# Altium PCB PCB_RB2_My _ver3.PcbDoc
Units mm, origin at the board's own origin, x right, y up, seen from the top; angles counter-clockwise.
Board outline 198 x 170 mm, 2 copper layers (Top, Bottom); 88 components, 70 nets, 391 pads, 183 vias.
Unrouted connection lines stored in the file: 79.
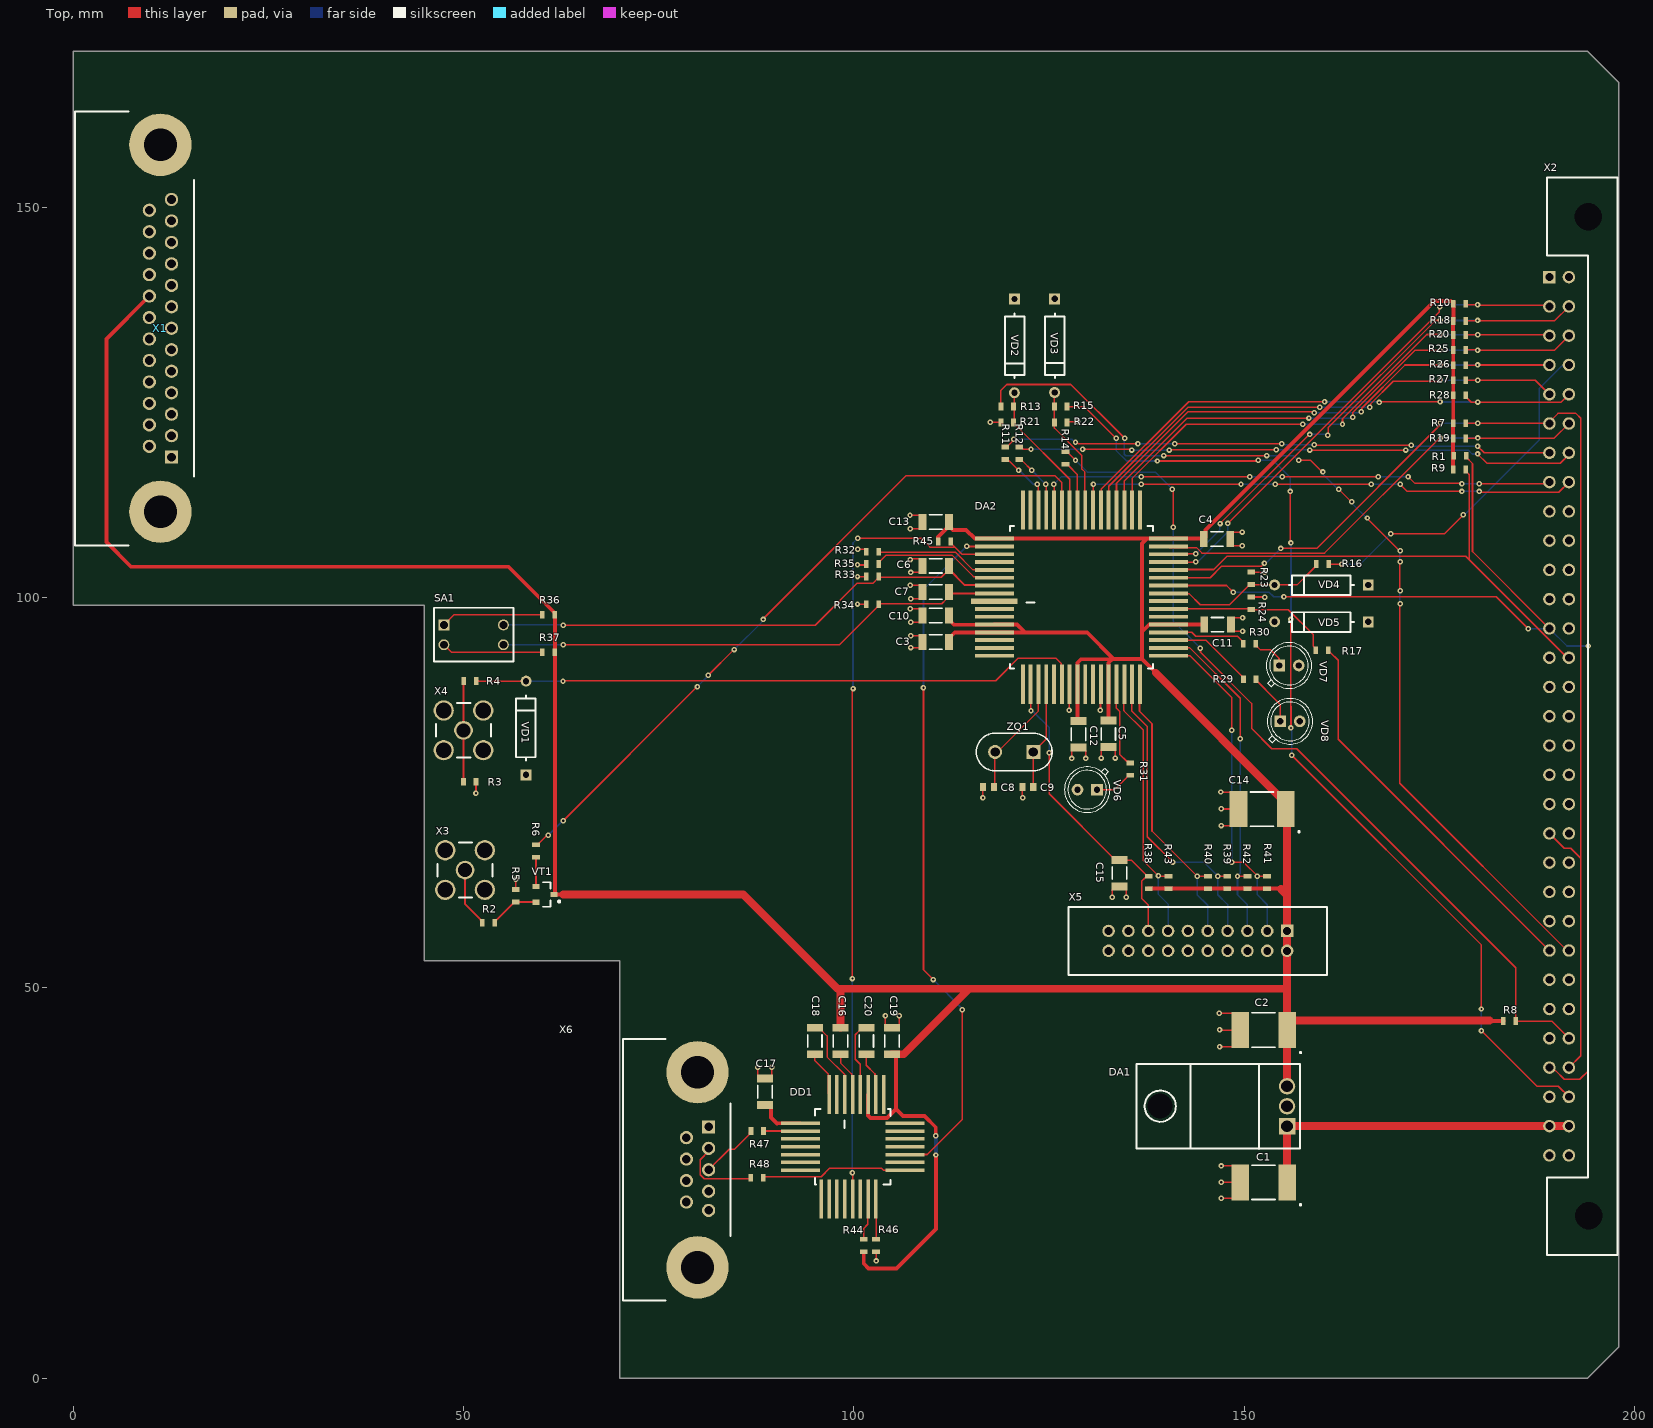
[diagram p0: Top view]
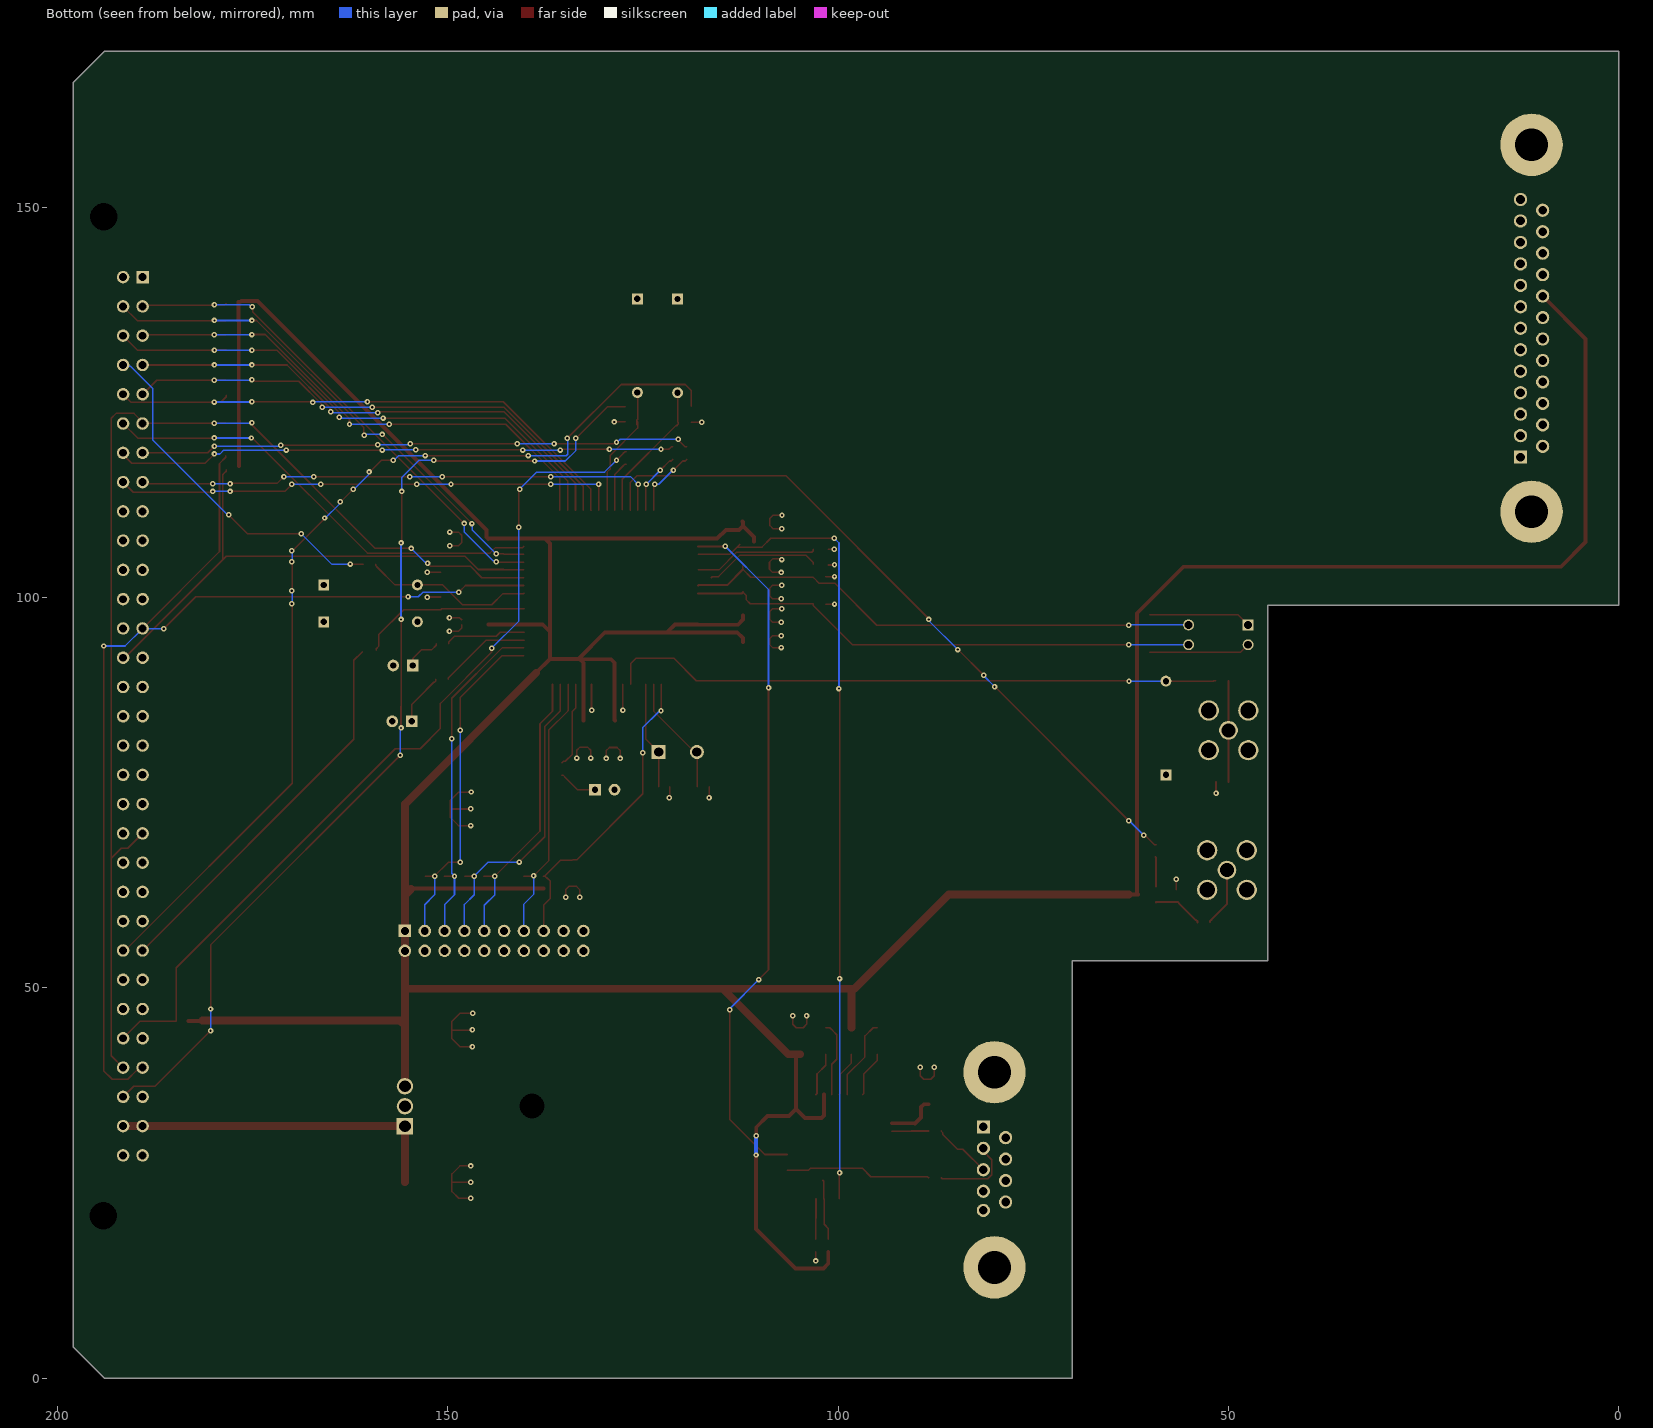
[diagram p1: Bottom view, seen from below]
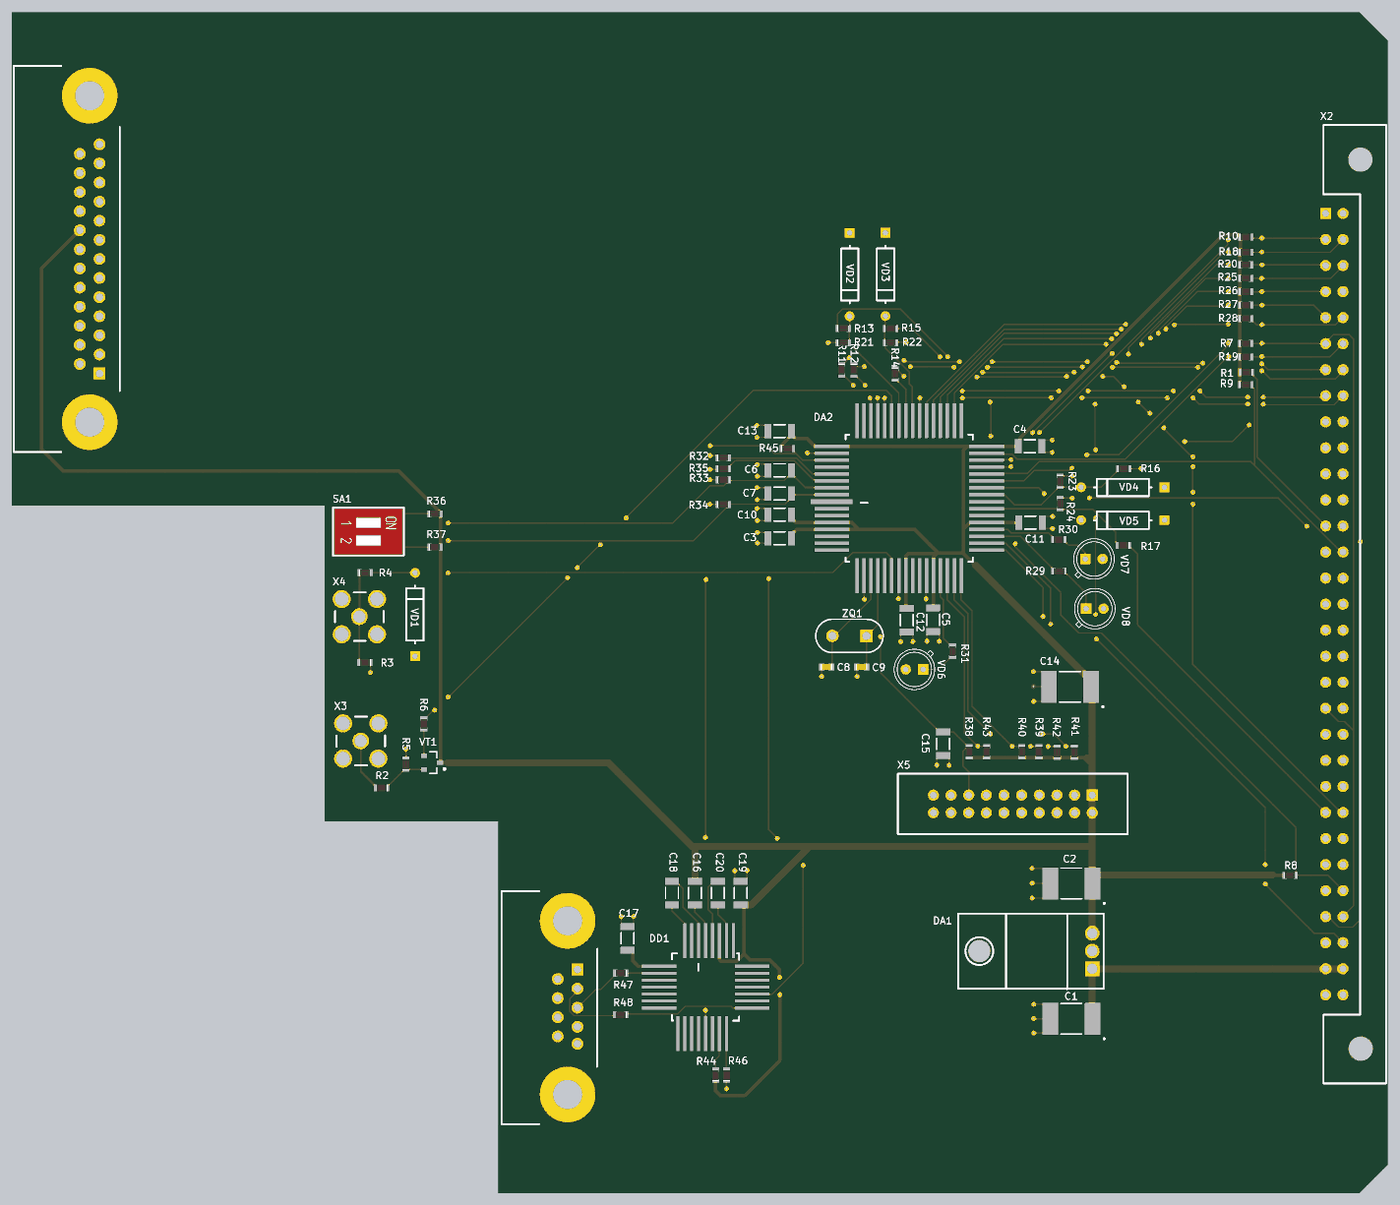
[diagram p2: 3D render of the assembled board from above, using the file's embedded part models]

## Layer stack, top to bottom
Top Solder: solder mask 0.0102, Solder Resist, Dk 3.5
Top: signal copper 0.0356
Dielectric 1: dielectric 0.32, FR-4, Dk 4.8
Bottom: signal copper 0.0356
Bottom Solder: solder mask 0.0102, Solder Resist, Dk 3.5

## Board outline
70,0 70,53.5 45,53.5 45,99 0,99 0,170 194,170 198,166 198,4 194,0

## Design rules (kind name [scope] priority, off if disabled: settings)
AcuteAngle [All] p1: minimum=3.50000000000000E+0001 checktracksonly=FALSE
BoardOutlineClearance "BoardOutlineClearance Fres ExtLayer" [OnTopLayer or OnBottomLayer] p1: gap=0.25 ignorepadtopadclearanceinfootprint=FALSE except(0: Arc-SplitContinuation Track-SplitContinuation SMDPad-SplitContinuation THPad-SplitContinuation Via-SplitContinuation Fill-SplitContinuation Poly-SplitContinuation Region-SplitContinuation Text-SplitContinuation) // Milling
BoardOutlineClearance "BoardOutlineClearance Fres IntLayer" [(OnMid        or OnMultiLayer) and not IsKeepOut] p2: gap=0.5 ignorepadtopadclearanceinfootprint=FALSE except(0: Arc-SplitContinuation Track-SplitContinuation SMDPad-SplitContinuation THPad-SplitContinuation Via-SplitContinuation Fill-SplitContinuation Poly-SplitContinuation Region-SplitContinuation Text-SplitContinuation) // Milling
Clearance "Clearance KeepOut" [All vs OnLayer('Keep-Out Layer')] p1: gap=0.5 ignorepadtopadclearanceinfootprint=TRUE // Standart
Clearance "Clearance Cap" [HasFootprint('CAPC3419X15N(1206)')] p2: gap=0 ignorepadtopadclearanceinfootprint=TRUE except(0.8: SMDPad-SMDPad)
Clearance "Clearance Sdt" [All] p3: gap=0.125 ignorepadtopadclearanceinfootprint=TRUE except(0.2: Arc-Fill Arc-Poly Track-Fill Track-Poly SMDPad-SMDPad SMDPad-Fill SMDPad-Poly THPad-Fill THPad-Poly Via-Fill Via-Poly Fill-Fill Fill-Poly Poly-Poly Poly-Region Poly-Text; 0.25: Arc-Hole Track-Hole SMDPad-Hole THPad-Hole Via-Hole Fill-Hole Poly-Hole Region-Hole Text-Hole) // Standart
ComponentClearance ComponentClearance_Connector [(HasFootprint('СНП347-20ВП22-В') OR HasFootprint('СНП268-25РП32-1-4-В') OR HasFootprint('СНП268-9ВП32-1-4-В') OR HasFootprint('ГРПМ9-62ШУ2-В') OR HasFootprint('DS1040-02RN') OR HasFootprint('HYR-1149'))] p1: gap=1.6 collisioncheckmode=3 verticalgap=0.2 showdistances=FALSE
ComponentClearance ComponentClearance_Res [HasFootprint('RESC1608X05N (0603)')] p2: gap=0.2 collisioncheckmode=3 verticalgap=0.2 showdistances=FALSE
ComponentClearance ComponentClearance_VD [HasFootprint('2С127Д-1') or HasFootprint('3Л341Б')] p3: gap=1.2 collisioncheckmode=3 verticalgap=0.2 showdistances=FALSE
ComponentClearance [All] p4: gap=0.8 collisioncheckmode=3 verticalgap=0.2 showdistances=FALSE
DiffPairsRouting "DiffPairsRouting 1 Oz" [All] p1: maxlimit=0.5 minlimit=0.125 mostfreqgap=0.3 toplayer_minwidth=0.125 toplayer_maxwidth=0.5 toplayer_prefwidth=0.2 bottomlayer_minwidth=0.125 bottomlayer_maxwidth=0.5 bottomlayer_prefwidth=0.2 maxuncoupledlength=12.7
HoleSize "Minimum HoleSize" [IsPad] p1: absolutevalues=TRUE maxlimit=5.9 minlimit=0.6 maxpercent=80.000 minpercent=20.000
HoleSize "Minimum HoleSize VIA 1" [IsVia] p2: absolutevalues=TRUE maxlimit=5.9 minlimit=0.3 maxpercent=80.000 minpercent=20.000 // Standart
HoleSize "Minimum HoleSize VIA 2" [IsVia] p3: absolutevalues=TRUE maxlimit=5.9 minlimit=0.2 maxpercent=80.000 minpercent=20.000 // Advance
HoleToHoleClearance Hole2HoleClearance [All] p1: gap=0.25 allowstackedmicrovias=FALSE
MinimumAnnularRing "Minimum AR VIA Standart" [All] p1: minimumring=0.15
MinimumAnnularRing "Minimum AR PAD Standart" [All] p2: minimumring=0.2
MinimumSolderMaskSliver "SolderMask Bridge Standart" [All] p1: minsoldermaskwidth=0.15 // All Masks
PlaneClearance "PlaneClearance Std" [All] p1: clearance=0.2 // Standart
PlaneConnect "TermalConnect Std" [All] p1: pad.planeconnectstyle=Relief pad.reliefexpansion=0.2 pad.reliefentries=4 pad.reliefconductorwidth=0.3 pad.reliefairgap=0.2 via.planeconnectstyle=Direct via.reliefexpansion=0.2 via.reliefentries=4 via.reliefconductorwidth=0.2 via.reliefairgap=0.2 // Standart
PolygonConnect PolygonConnect_Via [isVia] p1: connectstyle=Direct reliefconductorwidth=0.254 reliefentries=4 polygonreliefangle="90 Angle" airgapwidth=0.254
PolygonConnect "PolygonConnect Std" [All] p2: connectstyle=Relief reliefconductorwidth=0.2 reliefentries=4 polygonreliefangle="90 Angle" airgapwidth=0.2 // Standart
RoutingCorners [All] p1 off: cornerstyle=45-Degree minsetback=2.54 maxsetback=2.54
RoutingVias [All] p1: holewidth=0.3 width=0.7 viastyle="Through Hole" minholewidth=0.3 minwidth=0.7 maxholewidth=0.6 maxwidth=1.1 viatemplateguid#1={5BCA8359-3FDF-4503-88DF-982B2CC54C6B} viatemplatename#1=v60h30m0mx0(Tol0-10)
SMDEntry [All] p1: side=TRUE corner=TRUE anyangle=FALSE
SMDNeckDown [All] p1: percent=100.000
SMDToCorner [All] p1: distance=0
SMDToPlane [All] p1: distance=0
SilkToSilkClearance Silk2SilkClearance [All] p1: silktosilkclearance=0.15
SilkToSolderMaskClearance Silk2SolderMaskClearance [IsPad] p1: minsilkscreentomaskgap=0.15 clearancetoexposedcopper=FALSE
SolderMaskExpansion "SolderMaskExpansion Std" [All] p1: expansion=0.05 istentingtop=FALSE // Standart
UnRoutedNet [All] p1: checkbadconnections=TRUE
Width "Width Std" [All] p1: maxlimit=10 minlimit=0.125 preferedwidth=0.2 checkconnectedcopper=TRUE // Standart
19 further rules are at their usual default settings.

## Components (designator, comment, footprint, x,y, rotation, side; value= is the part's Value field where it differs from the comment)
C1 "К53-65-16В-100мкФАЖЯР.673546.004ТУ" Chip2PinSM127P600-8N(E) 152.5,25.1 r180 top value=100мк
C2 "К53-65-16В-100мкФАЖЯР.673546.004ТУ" Chip2PinSM127P600-8N(E) 152.5,44.6 r180 top value=100мк
C3 "К10-17в-Н90-0,1мкФ-3ОЖО.460.107ТУ" CAPC3419X15N(1206) 110.5,94.3 r180 top value=0,1мк
C4 "К10-17в-Н90-0,1мкФ-3ОЖО.460.107ТУ" CAPC3419X15N(1206) 146.525,107.525 r0 top value=0,1мк
C5 "К10-17в-Н90-0,1мкФ-3ОЖО.460.107ТУ" CAPC3419X15N(1206) 132.6,82.55 r270 top value=0,1мк
C6 "К10-17в-Н90-0,1мкФ-3ОЖО.460.107ТУ" CAPC3419X15N(1206) 110.5,104.075 r0 top value=0,1мк
C7 "К10-17в-Н90-0,1мкФ-3ОЖО.460.107ТУ" CAPC3419X15N(1206) 110.5,100.7 r0 top value=0,1мк
C8 "К10-17в-МПО-22Ф10%-1ОЖО.460.107ТУ" "CAPC1608X09N (0603)" 117.243,75.75 r180 top value=22
C9 "К10-17в-МПО-22Ф10%-1ОЖО.460.107ТУ" "CAPC1608X09N (0603)" 122.3,75.75 r180 top value=22
C10 "К10-17в-Н90-0,1мкФ-3ОЖО.460.107ТУ" CAPC3419X15N(1206) 110.5,97.7 r180 top value=0,1мк
C11 "К10-17в-Н90-0,1мкФ-3ОЖО.460.107ТУ" CAPC3419X15N(1206) 146.6,96.525 r0 top value=0,1мк
C12 "К10-17в-Н90-0,1мкФ-3ОЖО.460.107ТУ" CAPC3419X15N(1206) 128.8,82.5 r270 top value=0,1мк
C13 "К10-17в-Н90-0,1мкФ-3ОЖО.460.107ТУ" CAPC3419X15N(1206) 110.5,109.7 r180 top value=0,1мк
C14 "К53-65-16В-100мкФАЖЯР.673546.004ТУ" Chip2PinSM127P600-8N(E) 152.3,72.9 r180 top value=100мк
C15 "К10-17в-Н90-0,1мкФ-3ОЖО.460.107ТУ" CAPC3419X15N(1206) 134.025,64.7 r270 top value=0,1мк
C16 "К10-17в-Н30-0,22мкФ-3ОЖО.460.107ТУ" CAPC3419X15N(1206) 98.3,43.2 r90 top value=0,22мк
C17 "К10-17в-Н30-0,22мкФ-3ОЖО.460.107ТУ" CAPC3419X15N(1206) 88.6,36.7 r270 top value=0,22мк
C18 "К10-17в-Н30-0,22мкФ-3ОЖО.460.107ТУ" CAPC3419X15N(1206) 95,43.2 r270 top value=0,22мк
C19 "К10-17в-Н30-0,22мкФ-3ОЖО.460.107ТУ" CAPC3419X15N(1206) 104.9,43.2 r270 top value=0,22мк
C20 "К10-17в-Н30-0,22мкФ-3ОЖО.460.107ТУ" CAPC3419X15N(1206) 101.6,43.2 r270 top value=0,22мк
DA1 "1303ЕН3.3П" КТ-28А-2.01 163,32.3 r90 top
DA2 "1986ВЕ92У" 1986ВЕ92У 121.65,88.9 r0 top
DD1 "5559ИН4У" 5559ИН4У 98.8,36.3 r270 top
R1 "Р1-12-0,125-10кОм5%" "RESC1608X05N (0603)" 177.65,118.175 r180 top value=10к
R2 "Р1-12-0,1-05%" "RESC1608X05N (0603)" 53.2,58.35 r0 top value=0
R3 "Р1-12-0,1-505%" "RESC1608X05N (0603)" 50.8,76.4 r180 top value=50
R4 "Р1-12-0,125-1к5%" "RESC1608X05N (0603)" 50.825,89.325 r0 top value=1к
R5 "Р1-12-0,125-560Ом5%" "RESC1608X05N (0603)" 56.7,61.8 r270 top value=560
R6 "Р1-12-0,125-560Ом5%" "RESC1608X05N (0603)" 59.275,67.55 r270 top value=560
R7 "Р1-12-0,125-10кОм5%" "RESC1608X05N (0603)" 177.575,122.325 r180 top value=10к
R8 "Р1-12-0,1-0,155%" "RESC1608X05N (0603)" 184,45.75 r180 top value=0,15
R9 "Р1-12-0,125-10кОм5%" "RESC1608X05N (0603)" 177.6,116.4 r180 top value=10к
R10 "Р1-12-0,125-10кОм5%" "RESC1608X05N (0603)" 177.6,137.65 r180 top value=10к
R11 "Р1-12-0,1-0,155%" "RESC1608X05N (0603)" 119.4,118.5 r270 top value=0,15
R12 "Р1-12-0,1-0,155%" "RESC1608X05N (0603)" 121.2,118.5 r270 top value=0,15
R13 "Р1-12-0,1-1,8кОм5%" "RESC1608X05N (0603)" 119.65,124.5 r0 top value=1,8к
R14 "Р1-12-0,1-0,155%" "RESC1608X05N (0603)" 127.125,117.9 r270 top value=0,15
R15 "Р1-12-0,1-1кОм5%" "RESC1608X05N (0603)" 126.5,124.475 r180 top value=1к
R16 "Р1-12-0,1-1,8кОм5%" "RESC1608X05N (0603)" 160.05,104.3 r180 top value=1,8к
R17 "Р1-12-0,1-1,8кОм5%" "RESC1608X05N (0603)" 159.973,93.249 r180 top value=1,8к
R18 "Р1-12-0,125-10кОм5%" "RESC1608X05N (0603)" 177.6,135.45 r180 top value=10к
R19 "Р1-12-0,125-10кОм5%" "RESC1608X05N (0603)" 177.575,120.4 r180 top value=10к
R20 "Р1-12-0,125-10кОм5%" "RESC1608X05N (0603)" 177.583,133.65 r180 top value=10к
R21 "Р1-12-0,125-2705%" "RESC1608X05N (0603)" 119.65,122.45 r180 top value=270
R22 "Р1-12-0,125-2705%" "RESC1608X05N (0603)" 126.5,122.45 r0 top value=270
R23 "Р1-12-0,125-2705%" "RESC1608X05N (0603)" 150.9,102.475 r90 top value=270
R24 "Р1-12-0,125-2705%" "RESC1608X05N (0603)" 150.9,99.275 r90 top value=270
R25 "Р1-12-0,125-10кОм5%" "RESC1608X05N (0603)" 177.583,131.725 r180 top value=10к
R26 "Р1-12-0,125-10кОм5%" "RESC1608X05N (0603)" 177.583,129.775 r180 top value=10к
R27 "Р1-12-0,125-10кОм5%" "RESC1608X05N (0603)" 177.583,127.85 r180 top value=10к
R28 "Р1-12-0,125-10кОм5%" "RESC1608X05N (0603)" 177.583,125.925 r180 top value=10к
R29 "Р1-12-0,125-1к5%" "RESC1608X05N (0603)" 150.725,89.55 r0 top value=1к
R30 "Р1-12-0,125-1к5%" "RESC1608X05N (0603)" 150.7,94.1 r0 top value=1к
R31 "Р1-12-0,125-1к5%" "RESC1608X05N (0603)" 135.4,78.025 r270 top value=1к
R32 "Р1-12-0,125-0,155%" "RESC1608X05N (0603)" 102.375,105.875 r0 top value=0,15
R33 "Р1-12-0,125-10кОм5%" "RESC1608X05N (0603)" 102.4,102.7 r0 top value=10к
R34 "Р1-12-0,125-10кОм5%" "RESC1608X05N (0603)" 102.375,99.15 r0 top value=10к
R35 "Р1-12-0,125-10кОм5%" "RESC1608X05N (0603)" 102.4,104.3 r180 top value=10к
R36 "Р1-12-0,125-10кОм5%" "RESC1608X05N (0603)" 60.9,97.8 r0 top value=10к
R37 "Р1-12-0,125-10кОм5%" "RESC1608X05N (0603)" 60.9,93 r0 top value=10к
R38 "Р1-12-0,125-10кОм5%" "RESC1608X05N (0603)" 137.775,63.525 r90 top value=10к
R39 "Р1-12-0,125-10кОм5%" "RESC1608X05N (0603)" 147.825,63.525 r90 top value=10к
R40 "Р1-12-0,125-10кОм5%" "RESC1608X05N (0603)" 145.375,63.525 r90 top value=10к
R41 "Р1-12-0,125-10кОм5%" "RESC1608X05N (0603)" 152.925,63.5 r90 top value=10к
R42 "Р1-12-0,125-10кОм5%" "RESC1608X05N (0603)" 150.45,63.5 r90 top value=10к
R43 "Р1-12-0,125-10кОм5%" "RESC1608X05N (0603)" 140.3,63.525 r90 top value=10к
R44 "Р1-12-0,125-10кОм5%" "RESC1608X05N (0603)" 101.275,17 r90 top value=10к
R45 "Р1-12-0,125-10кОм5%" "RESC1608X05N (0603)" 111.6,107.2 r180 top value=10к
R46 "Р1-12-0,1-0,155%" "RESC1608X05N (0603)" 102.85,17 r90 top value=0,15
R47 "Р1-12-0,1-0,155%" "RESC1608X05N (0603)" 87.625,31.675 r180 top value=0,15
R48 "Р1-12-0,1-0,155%" "RESC1608X05N (0603)" 87.6,25.675 r180 top value=0,15
SA1 "DS1040-02RN" DS1040-02RN 47.5,96.5 r270 top
VD1 "2С133аА0.339.092ТУ" 2С127Д-1 58.025,77.3 r90 top
VD2 "2С133аА0.339.092ТУ" 2С127Д-1 120.575,138.25 r270 top
VD3 "2С133аА0.339.092ТУ" 2С127Д-1 125.725,138.275 r270 top
VD4 "2С133аА0.339.092ТУ" 2С127Д-1 165.9,101.625 r180 top
VD5 "2С133аА0.339.092ТУ" 2С127Д-1 165.9,96.9 r180 top
VD6 "3Л341БаА0.339.189ТУ" 3Л341Б 129.9,75.4 r180 top
VD7 "3Л341БаА0.339.189ТУ" 3Л341Б 155.75,91.3 r0 top
VD8 "3Л341БаА0.339.189ТУ" 3Л341Б 155.873,84.146 r0 top
VT1 "2Т368А9аА0.339.092ТУ" "SOT100P230X95-3N (2T368A9)" 60.45,61.975 r0 top
X1 "СНП268-25РП32-1-3-В" СНП268-25РП32-1-4-В 12.6,118 r270 top
X2 "ГРПМ9-62ШУ2-В" ГРПМ9-62ШУ2-В 188.8,153.8 r90 top
X3 "HYR-1149" HYR-1149 50.2,65.1 r0 top
X4 "HYR-1149" HYR-1149 50,83 r0 top
X5 "СНП347-20ВП32-В" СНП347-20ВП22-В 155.5,57.3 r180 top
X6 "СНП268-9ВП32-1-3-В" СНП268-9ВП32-1-4-В 81.4,32.2 r270 top
ZQ1 "РК386-П-8ДТ-8000КТУ6321-004-07614320-96" РК456 123,80.225 r180 top value=8М

## Footprints (in the part's own frame and the unit in brackets; to place one, negate y for a bottom-side part, rotate by r counter-clockwise, add the part's x,y. Pads: shape width x height; smd on the part's side, far side on the other; paste and mask are expansions set on the pad)
2С127Д-1 [mm]
  rect 1.4x1.4 hole 0.8: 1(0,0)
  round 1.4 hole 0.8: 2(12,0)
  silkscreen extent 1.85,-1.23 10.15,1.27
3Л341Б [mm]
  rect 1.5x1.5 hole 0.8: 1(-1.25,0)
  round 1.5 hole 0.8: 2(1.25,0)
  silkscreen extent -2.92,-2.92 2.92,2.92
1986ВЕ92У [mm]
  rect 6x0.7 smd: 1(-3.65,10.65)
  rect 5x0.5 smd: 2(-3.65,9.65) 3(-3.65,8.65) 4(-3.65,7.65) 5(-3.65,6.65) 6(-3.65,5.65) 7(-3.65,4.65) 8(-3.65,3.65) 25(18.65,3.65) 26(18.65,4.65) 27(18.65,5.65) 28(18.65,6.65) 29(18.65,7.65) 30(18.65,8.65) 31(18.65,9.65) 32(18.65,10.65) 33(18.65,11.65) 34(18.65,12.65) 35(18.65,13.65) 36(18.65,14.65) 37(18.65,15.65) 38(18.65,16.65) 39(18.65,17.65) 40(18.65,18.65) 57(-3.65,18.65) 58(-3.65,17.65) 59(-3.65,16.65) 60(-3.65,15.65) 61(-3.65,14.65) 62(-3.65,13.65) 63(-3.65,12.65) 64(-3.65,11.65)
  rect 0.5x5 smd: 9(0,0) 10(1,0) 11(2,0) 12(3,0) 13(4,0) 14(5,0) 15(6,0) 16(7,0) 17(8,0) 18(9,0) 19(10,0) 20(11,0) 21(12,0) 22(13,0) 23(14,0) 24(15,0) 41(15,22.3) 42(14,22.3) 43(13,22.3) 44(12,22.3) 45(11,22.3) 46(10,22.3) 47(9,22.3) 48(8,22.3) 49(7,22.3) 50(6,22.3) 51(5,22.3) 52(4,22.3) 53(3,22.3) 54(2,22.3) 55(1,22.3) 56(0,22.3)
  silkscreen extent -1.65,2 16.65,20.3
5559ИН4У [mm]
  rect 5x0.45 smd: 1(-0.05,0.04) 2(-0.05,-0.96) 3(-0.05,-1.96) 11(13.33,-1.96) 12(13.33,-0.96) 13(13.33,0.04) 14(13.33,1.04) 15(13.33,2.04) 16(13.33,3.04) 17(13.33,4.04) 25(-0.05,4.04) 26(-0.05,3.04) 27(-0.05,2.04) 28(-0.05,1.04) 29(-0.05,5.04) 30(13.33,-2.96)
  rect 0.45x5 smd: 4(3.64,-5.65) 5(4.64,-5.65) 6(5.64,-5.65) 7(6.64,-5.65) 8(7.64,-5.65) 9(8.64,-5.65) 10(9.64,-5.65) 18(9.64,7.73) 19(8.64,7.73) 20(7.64,7.73) 21(6.64,7.73) 22(5.64,7.73) 23(4.64,7.73) 24(3.64,7.73)
  silkscreen extent 1.8,-3.8 11.48,5.87
"CAPC1608X09N (0603)" [mm] "Chip Capacitor, 2-Leads, Body 1.60x0.80mm, IPC Medium Density"
  rect 0.8x1 smd: 1(-0.7,0) 2(0.7,0)
  body extent -0.85,-0.45 0.85,0.45, height 0.9
CAPC3419X15N(1206) [mm] "Chip Capacitor, 2-Leads, Body 3,35x1,90mm, IPC Medium Density"
  rect 1x2.05 smd: 1(-1.7,0) 2(1.7,0)
  silkscreen extent -0.8,-0.93 0.8,0.92, body extent -1.85,-1 1.85,1, height 1.5
Chip2PinSM127P600-8N(E) [mm]
  rect 2.25x4.6 smd: 1(-3.025,0) 2(3.025,0)
  silkscreen extent -4.77,-2.2 1.5,2.92, body extent -3.8,-2.3 3.8,2.3, height 4.1
DS1040-02RN [mm]
  rect 1.4x1.4 hole 1: 1(0,0)
  round 1.4 hole 1: 2(0,7.62) 3(2.54,0) 4(2.54,7.62)
  silkscreen extent -2.2,-1.3 4.7,8.9, body extent -2,-1.14 4.54,8.76, height 6.8
HYR-1149 [mm]
  round 2.4 hole 1.8: 1(0,0)
  round 2.6 hole 2: 2(2.54,-2.54) 3(2.54,2.54) 4(-2.54,2.54) 5(-2.54,-2.54)
  silkscreen extent -3.5,-3.5 3.5,3.5
"RESC1608X05N (0603)" [mm] "Chip Resistor, 2-Leads, Body 1.60x0.85mm, IPC Medium Density"
  rect 0.6x1 smd: 1(-0.8,0) 2(0.8,0)
  body extent -0.85,-0.48 0.85,0.48, height 0.45
"SOT100P230X95-3N (2T368A9)" [mm] "SOT23, 3-Leads, Body 2,85x2,30mm, Pitch 1,00mm, IPC Medium Density"
  rect 0.9x0.65 smd: 1(1.15,0) 2(-1.15,1) 3(-1.15,-1)
  silkscreen extent -0.3,-1.55 1.94,1.55, body extent -0.7,-1.52 0.7,1.53, height 0.95
ГРПМ9-62ШУ2-В [mm]
  round 3.2 hole 3.5: 1(-133,-5.35) 2(-5,-5.3)
  rect 1.6x1.6 hole 1: 1A(-12.75,-0.3)
  round 1.6 hole 1: 1B(-12.75,-2.8) 2A(-16.5,-0.3) 2B(-16.5,-2.8) 3A(-20.25,-0.3) 3B(-20.25,-2.8) 4A(-24,-0.3) 4B(-24,-2.8) 5A(-27.75,-0.3) 5B(-27.75,-2.8) 6A(-31.5,-0.3) 6B(-31.5,-2.8) 7A(-35.25,-0.3) 7B(-35.25,-2.8) 8A(-39,-0.3) 8B(-39,-2.8) 9A(-42.75,-0.3) 9B(-42.75,-2.8) 10A(-46.5,-0.3) 10B(-46.5,-2.8) 11A(-50.25,-0.3) 11B(-50.25,-2.8) 12A(-54,-0.3) 12B(-54,-2.8) 13A(-57.75,-0.3) 13B(-57.75,-2.8) 14A(-61.5,-0.3) 14B(-61.5,-2.8) 15A(-65.25,-0.3) 15B(-65.25,-2.8) 16A(-69,-0.3) 16B(-69,-2.8) 17A(-72.75,-0.3) 17B(-72.75,-2.8) 18A(-76.5,-0.3) 18B(-76.5,-2.8) 19A(-80.25,-0.3) 19B(-80.25,-2.8) 20A(-84,-0.3) 20B(-84,-2.8) 21A(-87.75,-0.3) 21B(-87.75,-2.8) 22A(-91.5,-0.3) 22B(-91.5,-2.8) 23A(-95.25,-0.3) 23B(-95.25,-2.8) 24A(-99,-0.3) 24B(-99,-2.8) 25A(-102.75,-0.3) 25B(-102.75,-2.8) 26A(-106.5,-0.3) 26B(-106.5,-2.8) 27A(-110.25,-0.3) 27B(-110.25,-2.8) 28A(-114,-0.3) 28B(-114,-2.8) 29A(-117.75,-0.3) 29B(-117.75,-2.8) 30A(-121.5,-0.3) 30B(-121.5,-2.8) 31A(-125.25,-0.3) 31B(-125.25,-2.8)
  silkscreen extent -138,-9 0,0
КТ-28А-2.01 [mm]
  rect 2.1x2.1 hole 1.5: 1(0,7.5)
  round 2.1 hole 1.5: 2(2.55,7.5) 3(5.1,7.5)
  round 2 hole 3.2: 4(2.55,23.75)
  silkscreen extent -2.95,5.85 7.95,26.8, body extent -2.53,7.21 7.63,26.7, height 4.2
РК456 [mm]
  rect 1.8x1.8 hole 1.2: 1(0,0)
  round 1.8 hole 1.2: 2(4.9,0)
  silkscreen extent -2.4,-2.4 7.3,2.4
СНП268-9ВП32-1-4-В [mm]
  rect 1.7x1.7 hole 1.1: 1(0,0)
  round 1.7 hole 1.1: 2(2.75,0) 3(5.5,0) 4(8.25,0) 5(10.7,0) 6(1.375,-2.84) 7(4.125,-2.84) 8(6.875,-2.84) 9(9.625,-2.84)
  round 8 hole 4.2: 10(-7,-1.42) 11(18,-1.42)
  silkscreen extent -11.25,-10.94 22.25,2.83
СНП268-25РП32-1-4-В [mm]
  rect 1.7x1.7 hole 1.1: 1(0,0)
  round 1.7 hole 1.1: 2(-2.75,0) 3(-5.5,0) 4(-8.25,0) 5(-11,0) 6(-13.75,0) 7(-16.5,0) 8(-19.25,0) 9(-22,0) 10(-24.75,0) 11(-27.5,0) 12(-30.25,0) 13(-33,0) 14(-1.375,-2.84) 15(-4.125,-2.84) 16(-6.875,-2.84) 17(-9.625,-2.84) 18(-12.375,-2.84) 19(-15.125,-2.84) 20(-17.875,-2.84) 21(-20.625,-2.84) 22(-23.375,-2.84) 23(-26.125,-2.84) 24(-28.875,-2.84) 25(-31.625,-2.84)
  round 8 hole 4.2: 26(7,-1.42) 27(-40,-1.42)
  silkscreen extent -44.3,-12.34 11.3,2.9
СНП347-20ВП22-В [mm]
  rect 1.6x1.6 hole 1.02: 1(0,0)
  round 1.6 hole 1.02: 2(0,2.54) 3(2.54,0) 4(2.54,2.54) 5(5.08,0) 6(5.08,2.54) 7(7.62,0) 8(7.62,2.54) 9(10.16,0) 10(10.16,2.54) 11(12.7,0) 12(12.7,2.54) 13(15.24,0) 14(15.24,2.54) 15(17.78,0) 16(17.78,2.54) 17(20.32,0) 18(20.32,2.54) 19(22.86,0) 20(22.86,2.54)
  silkscreen extent -5.12,-3.08 27.98,5.62

## Part data
C1 C2 C14: library part CapTan, "Танталовый конденсатор", manufacture=АЖЯР.673546.004ТУ, Footpr="\"E\"", Name="Танталовый конденсатор", name_main=К53-65-16В-, Units=Ф
C3 C4 C5 C6 C7 C10 C11 C12 C13 C15: library part CapCer, "Керамический конденсатор", manufacture=ОЖО.460.107ТУ, Footpr=1206, Name="Керамический конденсатор", name_main=К10-17в-Н90-, nameSuf=-3, Units=Ф
C8 C9: library part CapCer_2, "Керамический конденсатор", manufacture=ОЖО.460.107ТУ, Tolerance=10%, Footpr=0603, Name="Керамический конденсатор", name_main=К10-17в-МПО-, nameSuf=-1, Units=Ф
C16 C17 C18 C19 C20: library part CapCer_1, "Керамический конденсатор", manufacture=ОЖО.460.107ТУ, Footpr=1206, Name="Керамический конденсатор", name_main=К10-17в-Н30-, nameSuf=-3, Units=Ф
DA1: library part Stabil, manufacture=АЕЯР.431420.638ТУ, Name=Микросхема, name_main=1303ЕН3.3П
DA2: library part 1986ВЕ93, "Микроконтроллер", manufacture=АЕЯР.431290.711ТУ, Name=Микросхема, name_main=1986ВЕ92У
DD1: "Приемопередатчик RS232", manufacture=АЕЯР.431230.460ТУ, Name=Микросхема, name_main=5559ИН4У
R1 R7 R9 R10 R18 R19 R20 R25 R26 R27 R28 R33 R34 R35 R36 R37 R38 R39 R40 R41 R42 R43 R44 R45: library part Res_7, "Резистор", Manufacturer=АЛЯР.434110.005ТУ, Tolerance=5%, Name=Резистор, name_main=Р1-12-0,125-, Units=Ом
R2: library part Res_1, "Резистор", Manufacturer=АЛЯР.434110.005ТУ, Tolerance=5%, Name=Резистор, name_main=Р1-12-0,1-
R3: library part Res, "Резистор", Manufacturer=АЛЯР.434110.005ТУ, Tolerance=5%, Name=Резистор, name_main=Р1-12-0,1-
R4 R29 R30 R31: library part Res_8, "Резистор", Manufacturer=АЛЯР.434110.005ТУ, Tolerance=5%, Name=Резистор, name_main=Р1-12-0,125-
R5 R6: library part Res_3, "Резистор", Manufacturer=АЛЯР.434110.005ТУ, Tolerance=5%, Name=Резистор, name_main=Р1-12-0,125-, Units=Ом
R8 R11 R12 R14 R32 R46 R47 R48: library part Res_4, "Резистор", Manufacturer=АЛЯР.434110.005ТУ, Tolerance=5%, Name=Резистор
  R8 R11 R12 R14 R46 R47 R48: name_main=Р1-12-0,1-
  R32: name_main=Р1-12-0,125-
R13 R16 R17: library part Res_5, "Резистор", Manufacturer=АЛЯР.434110.005ТУ, Tolerance=5%, Name=Резистор, name_main=Р1-12-0,1-, Units=Ом
R15: library part Res_2, "Резистор", Manufacturer=АЛЯР.434110.005ТУ, Tolerance=5%, Name=Резистор, name_main=Р1-12-0,1-, Units=Ом
R21 R22 R23 R24: library part Res_6, "Резистор", Manufacturer=АЛЯР.434110.005ТУ, Tolerance=5%, Name=Резистор, name_main=Р1-12-0,125-
SA1: library part Switch, "Переключатель", Name=Переключатель, name_main=DS1040-02RN
VD1 VD2 VD3 VD4 VD5: library part 2С127Д-1, manufacture=аА0.339.092ТУ, Name=Стабилитрон, name_main=2С133
VD6 VD7 VD8: library part Led, "Индикатор", manufacture=аА0.339.189ТУ, Name=Индикатор, name_main=3Л341Б
VT1: library part 2Т368А, "NPN транзистор", manufacture=аА0.339.092ТУ, Name=Транзистор, name_main=2Т368А9
X1: library part СНП268-25РП, manufacture=БСАР.430420.014ТУ, Name=Разъемы, name_main=СНП268-25РП32-1-3-В
X2: library part GRPM9-62, manufacture=Ке0.364.009ТУ, Name=Разъемы, name_main=ГРПМ9-62ШУ2-В
X3 X4: library part SMA, manufacture=Чип&Дип, Name=Разъемы, name_main=HYR-1149
X5: library part СНП347-20ВП, manufacture=РЮМК.430420.012ТУ, Name=Разъемы, name_main=СНП347-20ВП32-В
X6: library part СНП268-9ВП, manufacture=БСАР.430420.014ТУ, Name=Разъемы, name_main=СНП268-9ВП32-1-3-В
ZQ1: library part XTAL, "Кварцевый резонатор", manufacture=ТУ6321-004-07614320-96, Name="Кварцевый резонатор", name_main=РК386-П-8ДТ-8000К, Units=Гц

## Via types
v1: diameter 0.7, hole 0.3, Top to Bottom, 182 vias
v2: diameter 0.7, hole 0.3, Top to Bottom, tented both sides, 1 vias

## Nets (pads, with @x,y where several pads share a name; then routed paths per layer and width w, separated by ;. In a path a pad name is that pad's centre, name@x,y a point inside that pad or via, vN(x,y) a via of type N, cw(c..) or ccw(c..) an arc to the next point about the centre after c; other vN are vias at no path point)
+3,3В: C2.1 C3.1 C4.1 C5.1 C10.1 C11.1 C12.1 C13.1 C14.1 C16.2 C19.2 DA1.3 DA2.4 DA2.5 DA2.16 DA2.20 DA2.29 DA2.40 DA2.57 DD1.26 R1.2 R7.2 R8.2 R9.2 R10.2 R18.2 R19.2 R20.2 R25.2 R26.2 R27.2 R28.2 R36.2 R37.2 R38.1 R39.1 R40.1 R41.1 R42.1 R43.1 R44.1 R45.2 VT1.1 X1.21 X5.1 X5.2 | length 587.7
  Top w0.5: X1.21@9.75,138.65 4.25,133.15 4.25,107.1 7.4,103.95 55.75,103.95 61.7,98 R36.2 R37.2 VT1.1@61.7,62.05 ; VT1.1 62.775,61.975 ; R44.1 101.275,14.7 101.9,14.075 105.475,14.075 110.525,19.125 v1(110.525,28.6) ; DD1.26 101.84,33.643 102.133,33.35 104.275,33.35 105.4,34.475 ; C19.2@105.15,41.5 105.4,41.25 105.4,34.475 ; v1(110.5,31.05) 110.5,32.15 109.075,33.575 106.3,33.575 105.4,34.475 ; R45.2 110.8,107.775 C13.1@112.2,109.175 ; C3.1 112.2,94.825 112.925,95.55 DA2.5 121.9,95.55 ; C10.1 112.2,97.175 112.85,96.525 DA2.4@117.925,96.525 ; C13.1@112.25,109.75 C13.1 C13.1@112.2,109.175 ; DA2.4 120.925,96.55 121.9,95.575 121.9,95.55 ; C12.1@128.575,84.25 128.65,84.325 DA2.16 128.65,91.65 129.1,92.1 133.1,92.1 ; C5.1 132.65,84.3 DA2.20 132.65,91.65 133.225,92.225 129.9,95.55 121.9,95.55 ; 133.325,92.125 136.934,92.125 ; R38.1 R43.1 R40.1 R39.1 150.45,62.725 152.925,62.725 154.675,62.725 154.725,62.675 ; 138.675,90.384 136.934,92.125 ; DA2.40@140.25,107.55 137.55,107.55 ; DA2.40 C4.1@144.8,107.55 ; C11.1@144.825,96.55 DA2.29 137.85,96.55 136.934,95.634 ; C4.1 145.075,107.775 145.075,108.675 174.4,138 176.45,138 176.55,137.9 176.75,137.9 176.8,137.85 R18.2 176.75,135.4 R20.2@176.75,133.683 ; 176.75,118.95 176.75,120.4 R19.2@176.75,120.775 ; R9.2@176.775,116.875 176.775,118.175 176.775,118.925 ; R19.2@176.775,120.8 R7.2@176.775,122.65 ; R7.2@176.783,122.671 R28.2 R27.2 R26.2 R25.2 R20.2 ; 181.45,45.825 181.525,45.75 R8.2 ; C13.1@112.2,109.175 112.7,108.675 114.375,108.675 115.5,107.55 DA2.57 137.55,107.55 ; 136.934,92.125 136.934,95.634 ; 136.934,95.634 136.934,106.934 137.55,107.55
  Top w1: 62.775,61.975 85.836,61.975 97.911,49.9 98.3,49.9 ; C16.2 98.3,49.9 ; C19.2 105.15,41.5 106.4,41.5 114.8,49.9 ; 138.675,90.384 138.675,90.375 155.5,73.55 155.5,61.9 ; 154.725,62.675 155.5,61.9 ; X5.1@155.5,57 X5.2 155.5,49.9 ; X5.1 155.5,61.9 ; C2.1 155.525,45.2 156.15,45.825 181.45,45.825 ; DA1.3@155.575,37.475 DA1.3 155.5,44.6 155.5,45.2 155.5,49.9 ; 98.3,49.9 114.8,49.9 ; 114.8,49.9 155.5,49.9
  Bottom w0.5: v1(110.5,31.05) 110.525,31.025 v1(110.525,28.6)
+5В: C1.1 DA1.1 X2.30A X2.30B | length 43.3
  Top w1: C1.1 155.5,25.125 DA1.1 X2.30A X2.30B
"+27В 2мкс": R13.1 X1.14 X2.24B | length 124.2
  Top w0.2: R13.1 118.85,126.55 119.6,127.3 127.8,127.3 v1(134.7,120.4) ; v1(139.7,118.2) 139.733,118.167 152.867,118.167 v1(152.9,118.2) ; v1(157,117.6) 157.033,117.567 158.533,117.567 160,116.1 v1(160.1,116.1) ; v1(162.1,113.9) 163.7,112.3 v1(163.8,112.3) ; v1(165.8,110.2) 165.8,110.1 169.9,106 v1(170,106) ; v1(170,99.2) 169.933,99.133 169.933,76.221 191.353,54.8 X2.24B ; v1(170,100.9) 169.933,100.967 169.933,104.533 v1(170,104.6)
  Bottom w0.2: v1(134.7,120.4) 134.633,120.333 134.633,118.367 134.833,118.167 139.667,118.167 v1(139.7,118.2) ; v1(152.9,118.2) 152.933,118.167 156.333,118.167 156.9,117.6 v1(157,117.6) ; v1@160.143,115.757 162,113.9 v1(162.1,113.9) ; v1(163.8,112.3) 163.896,112.204 163.896,112.004 165.7,110.2 v1(165.8,110.2) ; v1(170,99.2) 169.933,99.267 169.933,100.833 v1(170,100.9) ; v1(170,104.6) 169.933,104.667 169.933,105.933 v1(170,106)
"+27В вкл. 2мкс": R17.1 X1.19 X2.24A | length 49.9
  Top w0.2: R17.1@160.975,93.047 162.05,91.972 162.05,81.85 X2.24A
GND: C1.2 C2.2 C3.2 C4.2 C5.2 C6.1 C7.1 C8.2 C9.2 C10.2 C11.2 C12.2 C13.2 C14.2 C15.2 C17.1 C19.1 DA1.2 DA2.3 DA2.15 DA2.19 DA2.30 DA2.41 DA2.56 DD1.2 DD1.15 R3.1 R5.1 R21.2 R22.2 R23.2 R24.2 R32.1 R33.1 R34.1 R35.2 R46.1 VD1.1 VD2.1 VD3.1 VD4.1 VD5.1 VD6.2 VD7.2 VD8.2 X1.20 X2.1B X2.31B X3.2 X4.2 X5.4 X5.6 X5.8 X5.10 X5.12 X5.14 X5.16 X5.18 X5.20 X6.5 | length 106.4
  Top w0.2: v1(51.6,74.95) R3.1 ; R5.1 v1(56.7,63.925) ; v1(87.7,39.825) 87.7,38.737 88.138,38.3 89.038,38.3 89.475,38.737 v1(89.475,39.85) ; v1(100.475,99.175) 101.55,99.175 R34.1 ; v1(100.475,102.7) R33.1 ; v1(100.475,104.2) 100.494,104.181 101.281,104.181 101.3,104.2 ; v1(100.5,106.2) R32.1@101.3,106.2 ; R46.1 102.85,15.05 v1(102.875,15.025) ; v1(104.05,46.425) 104.05,45.337 104.487,44.9 C19.1 105.388,44.9 105.825,45.337 v1(105.825,46.45) ; v1(107.2,110.55) 108.35,110.55 108.75,110.15 108.75,109.225 108.35,108.825 v1(107.225,108.825) ; v1(107.25,98.575) 108.4,98.575 108.8,98.175 C10.2 108.8,97.25 108.4,96.85 v1(107.275,96.85) ; v1(107.25,101.575) 108.4,101.575 108.8,101.175 108.8,100.25 108.4,99.85 v1(107.275,99.85) ; v1(107.25,104.875) 107.325,104.95 108.4,104.95 108.8,104.55 108.8,103.625 108.4,103.225 v1(107.275,103.225) ; v1(107.3,93.6) 108.4,93.6 108.8,94 C3.2 ; v1(107.3,95.125) 108.4,95.125 108.792,94.733 C3.2@108.792,94.308 ; v1(116.544,74.375) C8.2 ; v1(117.475,122.45) R21.2@118.825,122.45 ; C9.2 121.6,74.4 v1(121.625,74.375) ; R22.2@127.3,122.525 128.675,122.525 v1(128.7,122.5) ; v1(127.575,85.575) 127.6,85.6 DA2.15@127.6,88.9 ; v1(127.925,79.4) 127.925,80.4 128.325,80.8 C12.2 129.3,80.8 129.7,80.4 v1(129.7,79.4) ; v1(131.575,85.55) 131.6,85.575 DA2.19@131.6,88.9 ; v1(131.7,79.45) 131.7,80.45 132.1,80.85 C5.2 133.075,80.85 133.475,80.45 v1(133.475,79.45) ; v1(133.125,61.6) 133.125,62.6 133.525,63 134.5,63 134.9,62.6 v1(134.9,61.6) ; v1(146.825,46.775) 146.85,46.75 148.45,46.75 149.475,45.725 C2.2 ; v1(146.85,42.475) 148.45,42.475 149.475,43.5 C2.2 ; v1(146.85,44.625) 146.875,44.6 C2.2 ; v1(147.025,75.1) 147.05,75.075 148.65,75.075 149.675,74.05 C14.2@149.675,72.925 ; v1(147.05,70.8) 148.65,70.8 149.675,71.825 C14.2@149.675,72.925 ; v2(147.05,72.95) 147.075,72.925 C14.2@149.675,72.925 ; v1(147.075,23.05) 148.6,23.05 149.475,23.925 C1.2 ; v1(147.075,25.125) 147.1,25.1 C1.2 ; v1(147.075,27.2) 148.45,27.2 149.475,26.175 C1.2 ; C11.2@148.225,96.55 148.225,96.1 148.625,95.7 149.775,95.7 v1(149.8,95.675) ; C11.2@148.225,97.15 148.5,97.425 v1(149.8,97.425) ; v1(149.75,106.65) 148.625,106.65 148.225,107.05 C4.2 148.225,108 148.625,108.4 v1(149.75,108.4) ; R24.2 152.6,100.075 v1(152.625,100.05) ; R23.2 151.4,103.275 151.425,103.25 v1(152.625,103.25)
NetC6_2: C6.2 DA2.63 R33.2 SA1.2 | length 67.1
  Top w0.2: v1@62.825,96.45 v1(62.8,96.475) 95.05,96.475 100.425,101.85 102.45,101.85 R33.2@103.175,102.575 ; R33.2@103.225,102.6 111.2,102.6 C6.2@112.2,103.6 ; C6.2@112.2,103.55 C6.2
  Top w0.254: C6.2@112.2,103.6 114.2,101.6 117.9,101.6 DA2.63@117.95,101.55
  Bottom w0.2: SA1.2 62.775,96.5 v1(62.8,96.475)
NetC7_2: C7.2 DA2.64 R34.2 SA1.4 | length 66.3
  Top w0.2: v1(62.775,93.95) 87.05,93.95 98.175,93.95 103.175,98.95 R34.2 103.225,99.2 111.25,99.2 111.8,99.75 111.8,100.3 C7.2
  Top w0.254: C7.2 112.35,100.55 DA2.64@117.95,100.55
  Bottom w0.2: SA1.4@55.205,93.875 SA1.4 62.765,93.96 v1(62.775,93.95)
NetC8_1: C8.1 DA2.11 ZQ1.2 | length 15.6
  Top w0.2: C8.1@118.05,75.75 118.05,80.175 ZQ1.2 118.391,80.225 123.65,85.484 DA2.11
NetC9_1: C9.1 DA2.12 ZQ1.1 | length 13.8
  Top w0.2: C9.1 ZQ1.1 124.65,81.875 DA2.12
NetC15_1: C15.1 DA2.10 R38.2 X5.15 | length 39.8
  Top w0.2: DA2.10 122.65,85.55 v1(122.7,85.5) ; v1(125.025,80.125) 125.025,74.875 133.5,66.4 C15.1 ; C15.1@134.075,66.375 135.525,66.375 R38.2@137.575,64.325 ; X5.15 137.72,60.63 136.9,61.45 136.9,63.7 137.325,64.125 137.375,64.125 R38.2@137.575,64.325 ; R38.2 R38.2@137.575,64.325
  Bottom w0.2: v1(122.7,85.5) 122.835,85.5 123.007,85.328 123.047,85.328 125.025,83.35 v1(125.025,80.125)
NetC16_1: C16.1 DD1.28 | length 5.8
  Top w0.2: C16.1 98.3,40.39 99.715,38.975 99.715,36.475 DD1.28
NetC17_2: C17.2 DD1.4 | length 6.5
  Top w0.4: 90.14,32.66 DD1.4
  Top w0.5: C17.2@88.4,35.1 89.025,35.1 89.375,34.75 89.375,33.425 90.14,32.66
NetC18_1: C18.1 DD1.1 | length 10.4
  Top w0.2: C18.1 95.525,44.9 96.575,43.85 96.575,41.15 98.825,38.9 DD1.1@98.825,36.35
NetC18_2: C18.2 DD1.3 | length 5.9
  Top w0.2: C18.2 95,40.69 96.715,38.975 96.715,36.475 DD1.3
NetC20_1: C20.1 DD1.27 | length 9.7
  Top w0.2: DD1.27 100.84,40.235 100.2,40.875 100.2,44.016 100.675,44.491 100.675,44.5 101.075,44.9 C20.1
NetC20_2: C20.2 DD1.25 | length 5.7
  Top w0.2: C20.2 101.6,40.09 102.715,38.975 102.715,36.475 DD1.25
NetDA2_14: DA2.14 R4.2 VD1.2 | length 79.1
  Top w0.2: R4.2 51.925,89.325 51.95,89.3 VD1.2 ; v1(62.75,89.3) 62.8,89.35 118.175,89.35 121.075,92.25 125.875,92.25 126.6,91.525 DA2.14@126.6,88.9
  Bottom w0.2: VD1.2 v1(62.75,89.3)
NetDA2_21: DA2.21 R31.1 | length 11
  Top w0.2: DA2.21@133.6,88.9 133.6,85.9 134.05,85.45 134.05,79.95 134.975,79.025 135.2,79.025 R31.1
NetDA2_22: DA2.22 R43.2 X5.13 | length 35.2
  Top w0.2: DA2.22@134.6,88.9 134.6,85.5 134.625,85.475 137.1,83 137.1,66.275 v1(139.025,64.35) 139.05,64.325 R43.2
  Bottom w0.2: v1(139.025,64.35) 139.025,61.975 140.26,60.74 X5.13
NetDA2_23: DA2.23 R39.2 X5.7 | length 40.2
  Top w0.2: DA2.23@135.6,88.9 135.6,85.475 135.625,85.45 137.6,83.475 137.6,69.375 v1(140.85,66.125) ; v1(146.625,64.325) R39.2
  Bottom w0.2: v1(140.85,66.125) 144.825,66.125 v1(146.625,64.325) 146.625,61.95 147.88,60.695 X5.7
NetDA2_24: DA2.24 R40.2 X5.9 | length 36.6
  Top w0.2: DA2.24@136.6,88.9 136.6,85.45 138.2,83.85 138.2,70.1 v1(143.975,64.325) R40.2
  Bottom w0.2: v1(143.975,64.325) 143.975,61.95 145.34,60.585 X5.9
NetDA2_25: DA2.25 R41.2 X5.3 | length 44.2
  Top w0.2: DA2.25 143.05,92.55 148.4,87.2 v1(148.4,83) ; v1(148.4,66.1) 149.925,66.1 v1(151.7,64.325) 151.725,64.3 R41.2
  Bottom w0.2: v1(148.4,66.1) v1(148.4,83) ; v1(151.7,64.325) 151.7,61.925 152.96,60.665 X5.3
NetDA2_26: DA2.26 R42.2 X5.5 | length 43.6
  Top w0.2: DA2.26 143.05,93.55 149.5,87.1 v1(149.5,81.9) ; v1(149.15,64.3) R42.2
  Bottom w0.2: v1(149.5,81.9) 149.5,64.7 149.15,64.35 149.15,61.925 150.42,60.655 X5.5
NetDA2_27: DA2.27 R29.1 | length 11.9
  Top w0.2: DA2.27@140.25,94.55 145.125,94.55 149.925,89.75 R29.1
NetDA2_28: DA2.28 R30.1 | length 10.4
  Top w0.2: DA2.28@140.25,95.55 143.3,95.55 143.8,95.05 149.15,95.05 149.9,94.3 R30.1
NetDA2_31: DA2.31 R17.2 R24.1 VD5.2 | length 22.2
  Top w0.2: DA2.31@140.25,98.55 DA2.31 150.825,98.55 R24.1 ; R24.1@150.825,98.5 R24.1@150.9,98.425 ; R24.1@150.9,98.45 155.65,98.45 158.873,95.227 158.873,93.749 159.173,93.449 R17.2
NetDA2_33: DA2.33 R16.2 R23.1 VD4.2 | length 21.9
  Top w0.2: DA2.33@140.25,100.55 140.283,100.517 142.933,100.517 144.375,99.075 148.125,99.075 150.463,101.413 150.463,101.438 150.65,101.625 VD4.2 156.775,101.625 159.05,103.9 159.25,104.1 R16.2
NetDA2_48: DA2.48 R15.2 R22.1 VD3.2 | length 17.9
  Top w0.2: R15.2@125.65,124.625 125.65,122.85 125.693,122.807 125.825,122.807 R22.1@125.825,122.125 ; R22.1@125.7,122.55 R22.1 125.7,121.725 129.175,118.25 129.175,116.5 129.6,116.075 DA2.48@129.6,111.2 ; R15.2@125.7,124.05 R15.2 125.7,126.25 VD3.2
NetDA2_49: DA2.49 R14.2 | length 6.6
  Top w0.2: R14.2 127.325,117.1 127.525,116.9 127.525,116.875 128.65,115.75 DA2.49
NetDA2_50: DA2.50 R13.2 R21.1 VD2.2 | length 18.1
  Top w0.2: R13.2@120.525,124.35 120.525,124.25 120.525,122.45 120.475,122.4 120.475,122.225 120.65,122.05 120.763,122.05 127.65,115.163 DA2.50@127.65,111.25 ; R13.2@120.575,124.35 120.575,124.925 VD2.2
NetDA2_51: DA2.51 R6.1 | length 91
  Top w0.2: R6.1 59.475,68.35 60.503,69.378 60.543,69.378 60.715,69.55 v1(60.85,69.55) ; v1(62.775,71.425) 79.95,88.6 v1(79.975,88.6) ; v1(81.35,90.05) 84.65,93.35 v1(84.7,93.35) ; v1(88.4,97.2) 88.4,97.3 106.7,115.6 125.762,115.6 126.631,114.731 126.64,114.721 126.64,111.21 DA2.51
  Bottom w0.2: v1(60.85,69.55) 62.725,71.425 v1(62.775,71.425) ; v1(79.975,88.6) 81.35,89.975 v1(81.35,90.05) ; v1(84.7,93.35) 88.229,96.879 88.229,96.894 88.4,97.065 v1(88.4,97.2)
NetDA2_53: DA2.53 R12.2 | length 8.3
  Top w0.2: R12.2 121.4,117.5 121.6,117.5 v1(122.8,116.3) ; DA2.53 v1@124.65,114.75
  Bottom w0.2: v1(122.8,116.3) v1(124.6,114.5)
NetDA2_54: DA2.54 R11.2 | length 8.8
  Top w0.2: R11.2 119.6,117.5 119.9,117.5 v1(121.1,116.3) ; v1(123.5,114.5) 123.5,114.365 123.65,114.215 DA2.54
  Bottom w0.2: v1(121.1,116.3) 121.2,116.3 122.99,114.51 123.49,114.51 v1(123.5,114.5)
NetDA2_58: DA2.58 DD1.20 | length 90.5
  Top w0.2: DD1.20 109.41,28.66 113.9,33.15 v1(113.9,47.225) ; v1(108.925,88.475) 108.925,52.325 v1(110.175,51.075) ; v1(114.475,106.575) 114.5,106.55 DA2.58
  Bottom w0.2: v1(108.925,88.475) 108.925,101.025 v1(114.475,106.575) ; v1(110.175,51.075) 113.9,47.35 v1(113.9,47.225)
NetDA2_59: DA2.59 DD1.14 R45.1 | length 103.7
  Top w0.2: v1(99.825,26.325) 99.84,26.31 DD1.14 ; v1(99.825,51.2) 99.825,88.275 v1(99.9,88.35) ; v1(100.5,107.6) 108.625,107.6 109.75,106.475 112.925,106.475 ; R45.1@112.6,106.8 112.925,106.475 ; DA2.59@117.95,105.55 113.85,105.55 112.925,106.475
  Bottom w0.2: v1(99.825,26.325) v1(99.825,51.2) ; v1(99.9,88.35) 99.9,107 v1(100.5,107.6)
NetDA2_61: DA2.61 R32.2 | length 16
  Top w0.2: R32.2@103.2,106.2 103.2,106 103.4,105.8 113.025,105.8 115.275,103.55 DA2.61@117.95,103.55
NetDA2_62: DA2.62 R35.1 | length 14.9
  Top w0.2: R35.1 103.2,104.5 104.15,105.45 112.575,105.45 115.325,102.7 116.125,102.7 DA2.62@116.275,102.55
NetDD1_5: DD1.5 R47.1 | length 4.7
  Top w0.2: R47.1 90.635,31.675 90.65,31.66 DD1.5
NetDD1_16: DD1.16 R44.2 | length 7.9
  Top w0.2: R44.2 101.275,19.2 101.8,19.725 101.8,22.93 DD1.16 101.84,25.245 101.965,25.37 DD1.16@101.969,25.37
NetDD1_17: DD1.17 R46.2 | length 5.2
  Top w0.2: DD1.17 102.84,20.47 102.85,20.46 R46.2
NetDD1_18: DD1.18 R48.1 | length 18.7
  Top w0.2: R48.1 88.55,25.825 95.825,25.825 96.9,26.9 103.55,26.9 103.79,26.66 DD1.18
NetR2_1: R2.1 X3.1 | length 7.6
  Top w0.254: X3.1 50.2,60.725 52.202,58.723 52.227,58.723 52.4,58.55 R2.1@52.4,58.475
NetR2_2: R2.2 R5.2 VT1.3 | length 6.5
  Top w0.254: R2.2 54,58.55 54.173,58.723 54.248,58.723 56.327,60.802 56.327,60.827 56.5,61 59.275,61 VT1.3
NetR3_2: R3.2 R4.1 X4.1 | length 12.9
  Top w0.254: R3.2 X4.1 50.025,83.025 R4.1
NetR6_2: R6.2 VT1.2 | length 3.8
  Top w0.254: VT1.2 59.275,63 59.275,66.7 R6.2@59.325,66.75
NetR29_2: R29.2 VD8.1 | length 6.9
  Top w0.2: R29.2 151.525,89.35 151.725,89.15 151.8,89.15 153.8,87.15 154.6,86.35 VD8.1@154.6,84
NetR30_2: R30.2 VD7.1 | length 4.8
  Top w0.2: R30.2 151.5,93.9 152.1,93.3 153.4,93.3 154.467,92.233 154.467,91.333 VD7.1
NetR31_2: R31.2 VD6.1 | length 5
  Top w0.2: VD6.1 133.4,75.4 135,77 135,77.025 135.2,77.225 R31.2
NetR36_1: R36.1 SA1.1 | length 13.1
  Top w0.2: SA1.1 48.8,97.8 R36.1
NetR37_1: R37.1 SA1.3 | length 13
  Top w0.2: SA1.3 48.46,93 R37.1
NetR47_2: R47.2 X6.3 | length 7.9
  Top w0.2: X6.3@81.3,26.45 X6.3@81.475,26.625 ; X6.3 84.05,29.35 84.725,29.35 86.625,31.25 86.625,31.475 R47.2
NetR48_2: R48.2 X6.2 | length 10.6
  Top w0.2: X6.2 81.4,29.075 80.325,28 80.325,26.075 80.85,25.55 86.675,25.55 R48.2
"Внеш. зап. 15В": R15.1 X1.16 X2.29B | length 129.1
  Top w0.2: R15.1 129.525,124.475 v1(133.6,120.4) ; v1(138.9,117.5) 151.708,117.5 v1(151.8,117.592) ; v1(155.9,113.6) 155.9,107.367 155.904,107.363 155.904,107.096 v1(156,107) ; v1(156,83.3) 156,86.071 155.975,86.096 155.975,97.175 v1(156,97.2) ; v1(156.1,79.8) 180.4,55.5 v1(180.4,47.3) ; v1(180.4,44.5) 187.5,37.4 190.25,37.4 X2.29B
  Bottom w0.2: v1(133.6,120.4) 133.6,118.85 134.95,117.5 v1(138.9,117.5) ; v1(151.8,117.592) 151.808,117.6 153.7,117.6 155.9,115.4 v1(155.9,113.6) ; v1(156,83.3) 156,83.165 156.1,83.065 v1(156.1,79.8) ; v1(156,97.2) v1(156,107) ; v1(180.4,44.5) v1(180.4,47.3)
"Внеш. зап. лог. 1": DA2.34 R1.1 X1.17 X2.13A X2.28A | length 144.1
  Top w0.2: DA2.34 147.75,101.55 v1(148.6,100.7) ; v1(155.1,100.1) 182.3,100.1 v1(186.4,96) ; R1.1 178.45,117.975 179.25,117.175 179.25,105.9 X2.13A ; X2.28A 189.479,39.8 189.857,39.422 189.878,39.422 191,38.3 193,38.3 194.1,39.4 v1(194.1,93.8)
  Bottom w0.2: v1(148.6,100.7) 153.2,100.7 153.8,100.1 v1(155.1,100.1) ; v1(186.4,96) 189.05,96 X2.13A 191.35,93.8 v1(194.1,93.8)
"Имп. 0": DA2.37 R10.1 X1.2 X2.2A | length 65.1
  Top w0.2: DA2.37 143.75,104.55 v1(143.8,104.6) ; v1(147.9,109.5) 175.016,136.616 175.016,137.215 v1(175.075,137.275) ; R10.1 178.55,137.5 v1(179.9,137.5) 179.933,137.467 188.933,137.467 X2.2A
  Bottom w0.2: v1(143.8,104.6) 143.896,104.696 144.196,104.696 147.9,108.4 v1(147.9,109.5) ; v1(175.075,137.275) 175.211,137.275 175.436,137.5 v1(179.9,137.5)
"Имп. 1": DA2.38 R18.1 X1.3 X2.2B | length 67.1
  Top w0.2: DA2.38 142.8,105.55 142.85,105.6 v1(143.8,105.6) ; v1(146.913,109.487) 158.325,120.9 v1(158.4,120.9) ; v1(160.7,120.8) 160.75,120.85 160.75,121.75 174.5,135.5 v1(175.1,135.5) ; R18.1 179.85,135.45 v1(179.9,135.5) 179.95,135.45 189.75,135.45 X2.2B
  Bottom w0.2: v1(143.8,105.6) 146.9,108.7 146.9,109.475 v1(146.913,109.487) ; v1(158.4,120.9) 160.465,120.9 160.565,120.8 v1(160.7,120.8) ; v1(175.1,135.5) v1(179.9,135.5)
"Имп. 1 ПРД 1к": R11.1 X1.10 X2.7A | length 70.6
  Top w0.2: R11.1 119.6,119.3 120.5,120.2 v1(120.5,120.3) ; v1(128.4,119.9) 128.535,119.9 128.735,119.7 v1(136.4,119.7) ; v1(141.1,119.7) v1(154.8,119.7) ; v1(159,119.6) 159.135,119.6 159.235,119.5 v1(171.4,119.5) ; v1(179.9,119.4) 180.75,118.55 X2.7A
  Bottom w0.2: v1@120.764,120.3 127.933,120.3 128.333,119.9 v1(128.4,119.9) ; v1(136.4,119.7) v1(141.1,119.7) ; v1(154.8,119.7) 154.896,119.604 155.163,119.604 155.167,119.6 v1(159,119.6) ; v1(171.4,119.5) 171.535,119.5 171.635,119.4 v1(179.9,119.4)
"Имп. 1 ПРД 2к": R12.1 X1.11 X2.7B | length 72
  Top w0.2: R12.1 121.4,119.3 121.7,119 v1(122.7,119) ; v1(129.3,119) 135.365,119 135.465,118.9 v1(135.6,118.9) ; v1(140.4,118.9) 140.419,118.919 154.081,118.919 v1(154.1,118.938) ; v1(158.4,118.9) v1(170.7,118.9) ; v1(179.9,118.4) 181.1,117.2 190.5,117.2 191.6,118.3 X2.7B
  Bottom w0.2: v1(122.7,119) v1(129.3,119) ; v1(135.6,118.9) v1(140.4,118.9) ; v1(154.1,118.938) 154.119,118.919 158.381,118.919 v1(158.4,118.9) ; v1(170.7,118.9) 178.7,118.9 179.2,118.4 v1(179.9,118.4)
"Имп. 2": DA2.42 R20.1 X1.4 X2.3A | length 67.1
  Top w0.2: DA2.42 135.65,115.25 142.6,122.2 v1(157.5,122.2) ; v1(162.6,122.2) 162.6,122.9 173.4,133.7 v1(175.1,133.7) ; R20.1 189,133.65 X2.3A
  Bottom w0.2: v1(157.5,122.2) v1(162.6,122.2) ; v1(175.1,133.7) 175.147,133.653 v1(179.918,133.653)
"Имп. 3": DA2.43 R25.1 X1.5 X2.3B | length 70.3
  Top w0.2: DA2.43 134.65,114.95 142.7,123 v1(158.3,123) ; v1(163.9,123.1) 163.9,123.7 171.9,131.7 v1(175.1,131.7) ; R25.1 179.875,131.725 v1(179.9,131.7) 189.75,131.7 X2.3B
  Bottom w0.2: v1(158.3,123) 163.533,123 163.537,123.004 163.804,123.004 v1(163.9,123.1) ; v1(175.1,131.7) v1(179.9,131.7)
"Имп. 3МГц": DA2.35 R7.1 X1.1 X2.6A X2.20A X2.28B | length 153
  Top w0.2: DA2.35 145.65,102.55 147.14,104.04 152.233,104.04 152.592,104.4 v1(152.6,104.4) ; v1(154.7,106.3) 159.3,106.3 175.004,122.004 175.004,122.304 v1(175.1,122.4) ; R7.1 v1@179.975,122.325 ; v1(179.918,122.353) 179.947,122.353 v1@179.975,122.325 ; v1@180,122.3 v1@179.975,122.325 ; X2.20A 191,67.9 191.85,67.9 193.125,66.625 ; X2.28B 193.125,41.325 193.125,66.625 ; v1@179.975,122.325 189.075,122.325 X2.6A 189.1,122.5 190.2,123.6 192.5,123.6 193.125,122.975 193.125,66.625
  Bottom w0.2: v1(152.6,104.4) 152.735,104.4 152.895,104.56 152.96,104.56 v1(154.7,106.3) ; v1(175.1,122.4) 175.147,122.353 v1(179.918,122.353)
"Имп. 3МГц инв.": DA2.36 R9.1 X2.14B | length 69.1
  Top w0.2: DA2.36 142.8,103.55 142.85,103.6 146.1,103.6 147.8,105.3 178.4,105.3 178.85,104.85 ; R9.1 178.4,116.2 178.6,116 178.85,115.75 178.85,104.85 ; X2.14B 191.4,92.3 178.85,104.85
"Имп. 4": DA2.44 R26.1 X1.6 X2.4A | length 67
  Top w0.2: DA2.44 133.65,114.65 142.8,123.8 158.633,123.8 158.637,123.796 158.904,123.796 v1(159,123.7) ; v1(165,123.8) 165.06,123.86 165.06,124.26 170.6,129.8 v1(175.1,129.8) ; R26.1 179.875,129.775 v1(179.9,129.8) X2.4A
  Bottom w0.2: v1(159,123.7) 164.765,123.7 164.865,123.8 v1(165,123.8) ; v1(175.1,129.8) v1(179.9,129.8)
"Имп. 5": DA2.45 R27.1 X1.7 X2.5A | length 67.6
  Top w0.2: DA2.45 132.65,114.25 142.8,124.4 v1(159.7,124.4) ; v1(166.1,124.4) 166.196,124.496 166.196,124.796 169.1,127.7 174.765,127.7 174.965,127.9 v1(175.1,127.9) ; R27.1 187.3,127.85 X2.5A
  Bottom w0.2: v1(159.7,124.4) v1(166.1,124.4) ; v1(175.1,127.9) 175.147,127.853 v1(179.918,127.853)
"Имп. 6": DA2.46 R28.1 X1.8 X2.5B | length 69.8
  Top w0.2: DA2.46 131.7,111.25 131.7,113.9 142.9,125.1 v1(160.3,125.1) ; v1(167.3,125) 167.372,125.072 175.072,125.072 v1(175.1,125.1) ; R28.1 178.383,125.725 179.083,125.025 190.575,125.025 X2.5B
  Bottom w0.2: v1(160.3,125.1) 167.065,125.1 167.165,125 v1(167.3,125) ; v1(175.1,125.1) 175.147,125.053 v1(179.918,125.053)
"Имп. ПЗ АПД": DA2.39 R19.1 X1.9 X2.6B | length 60.1
  Top w0.2: DA2.39 140.437,106.413 143.887,106.413 144.6,105.7 160.3,105.7 175.043,120.443 v1(175.157,120.443) ; R19.1 189.7,120.4 X2.6B
  Bottom w0.2: v1(175.157,120.443) 175.162,120.448 179.913,120.448 v1(179.918,120.453)
Лог.1: R8.1 R14.1 X1.15 X2.27B | length 111.6
  Top w0.2: R14.1 127.325,118.7 127.525,118.5 127.525,118.475 v1(128.4,117.6) ; v1(140.8,113.9) 140.896,113.804 140.896,113.537 140.9,113.533 v1(140.9,109) ; v1(144.4,93.5) 144.41,93.49 144.41,92.99 150.95,86.45 150.95,83.25 153.55,80.65 156.75,80.65 184.8,52.6 R8.1 189.4,45.75 X2.27B
  Bottom w0.2: v1(128.4,117.6) 129.925,116.075 138.625,116.075 v1(140.8,113.9) ; v1(140.9,109) 140.9,97 v1(144.4,93.5)
"Призн. 1мкс": DA2.52 X1.12 X2.8A | length 67.7
  Top w0.2: v1(125.6,114.5) 125.65,114.45 DA2.52 ; v1(136.8,115.5) v1(150.7,115.5) ; v1(154.9,115.5) v1(167.2,115.5) ; v1(171,115.5) 171.876,114.624 177.876,114.624 v1(177.9,114.6) ; v1(180.1,114.6) 188.9,114.6 X2.8A
  Bottom w0.2: v1(125.6,114.5) 126.6,115.5 v1(136.8,115.5) ; v1(150.7,115.5) v1(154.9,115.5) ; v1(167.2,115.5) v1(171,115.5) ; v1(177.9,114.6) v1(180.1,114.6)
"Призн. 2мкс": DA2.47 X1.13 X2.8B | length 65.2
  Top w0.2: DA2.47 130.65,114.45 v1(130.7,114.5) ; v1(136.8,114.5) v1(149.6,114.5) ; v1(154,114.5) v1(166.3,114.5) ; v1(170,114.5) 170.9,113.6 v1(177.9,113.6) ; v1(180.1,113.6) 180.196,113.504 180.463,113.504 180.467,113.5 190.3,113.5 X2.8B
  Bottom w0.2: v1(130.7,114.5) v1(136.8,114.5) ; v1(149.6,114.5) v1(154,114.5) ; v1(166.3,114.5) v1(170,114.5) ; v1(177.9,113.6) v1(180.1,113.6)
Режим: R16.1 X1.18 X2.4B | length 45.2
  Top w0.2: R16.1 v1(162.5,104.3) ; v1(168.8,108.2) 175.685,108.2 v1(178.08,110.595)
  Bottom w0.2: v1(162.5,104.3) 164.9,104.3 v1(168.8,108.2) ; v1(178.08,110.595) 178.195,110.595 187.8,120.2 187.8,126.783 190.631,129.614 191.414,129.614 X2.4B
pads on no net: DA1.4 DA2.1 DA2.2 DA2.6 DA2.7 DA2.8 DA2.9 DA2.13 DA2.17 DA2.18 DA2.32 DA2.55 DA2.60 DD1.6 DD1.7 DD1.8 DD1.9 DD1.10 DD1.11 DD1.12 DD1.13 DD1.19 DD1.21 DD1.22 DD1.23 DD1.24 DD1.29 DD1.30 X1.22 X1.23 X1.24 X1.25 X1.26 X1.27 X2.1 X2.1A X2.2 X2.9A X2.9B X2.10A X2.10B X2.11A X2.11B X2.12A X2.12B X2.13B X2.14A X2.15A X2.15B X2.16A X2.16B X2.17A X2.17B X2.18A X2.18B X2.19A X2.19B X2.20B X2.21A X2.21B X2.22A X2.22B X2.23A X2.23B X2.25A X2.25B X2.26A X2.26B X2.27A X2.29A X2.31A X3.3 X3.4 X3.5 X4.3 X4.4 X4.5 X5.11 X5.17 X5.19 X6.1 X6.4 X6.6 X6.7 X6.8 X6.9 X6.10 X6.11